# Altium PCB SmartWatchFinalProject.PcbDoc
Units mm, origin at the board's own origin, x right, y up, seen from the top; angles counter-clockwise.
Board outline 32.55 x 30.39 mm, 4 copper layers (Top Layer, Layer 1, Layer 2, Bottom Layer), stack 0.82 mm thick; 54 components, 48 nets, 236 pads, 106 vias.
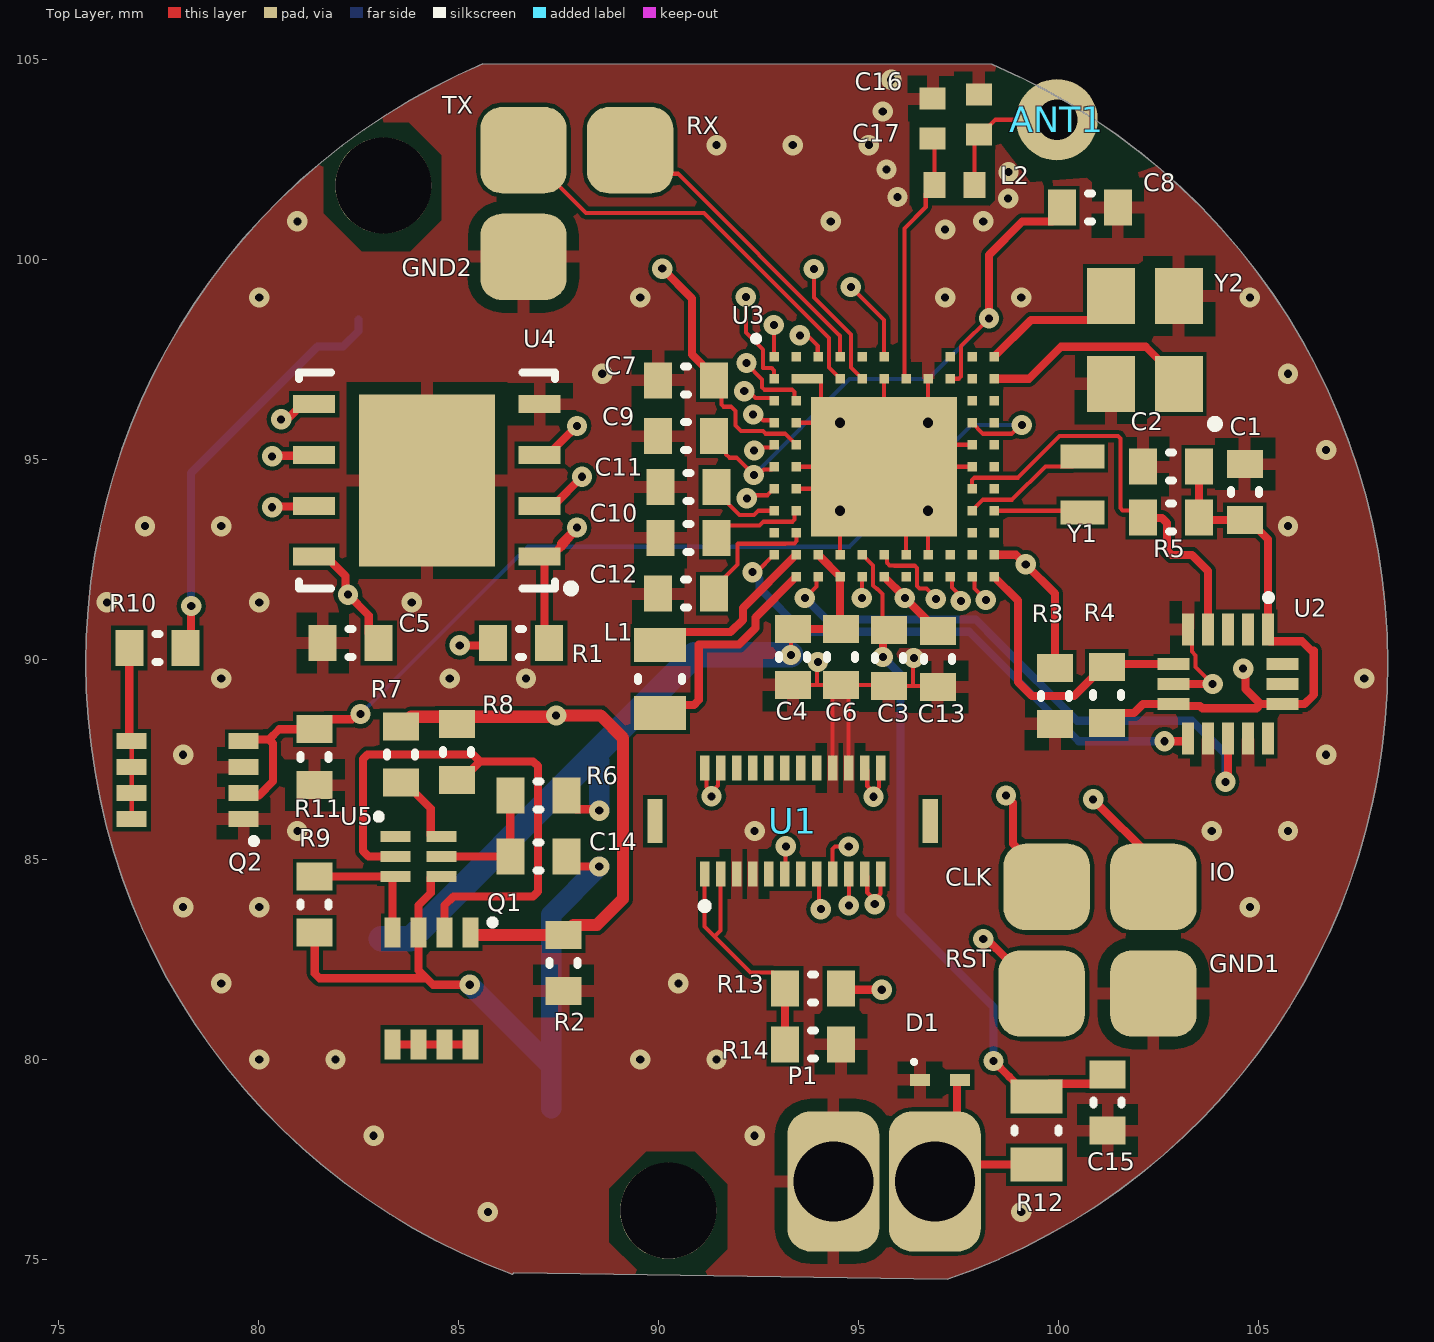
[diagram p0: Top Layer view]
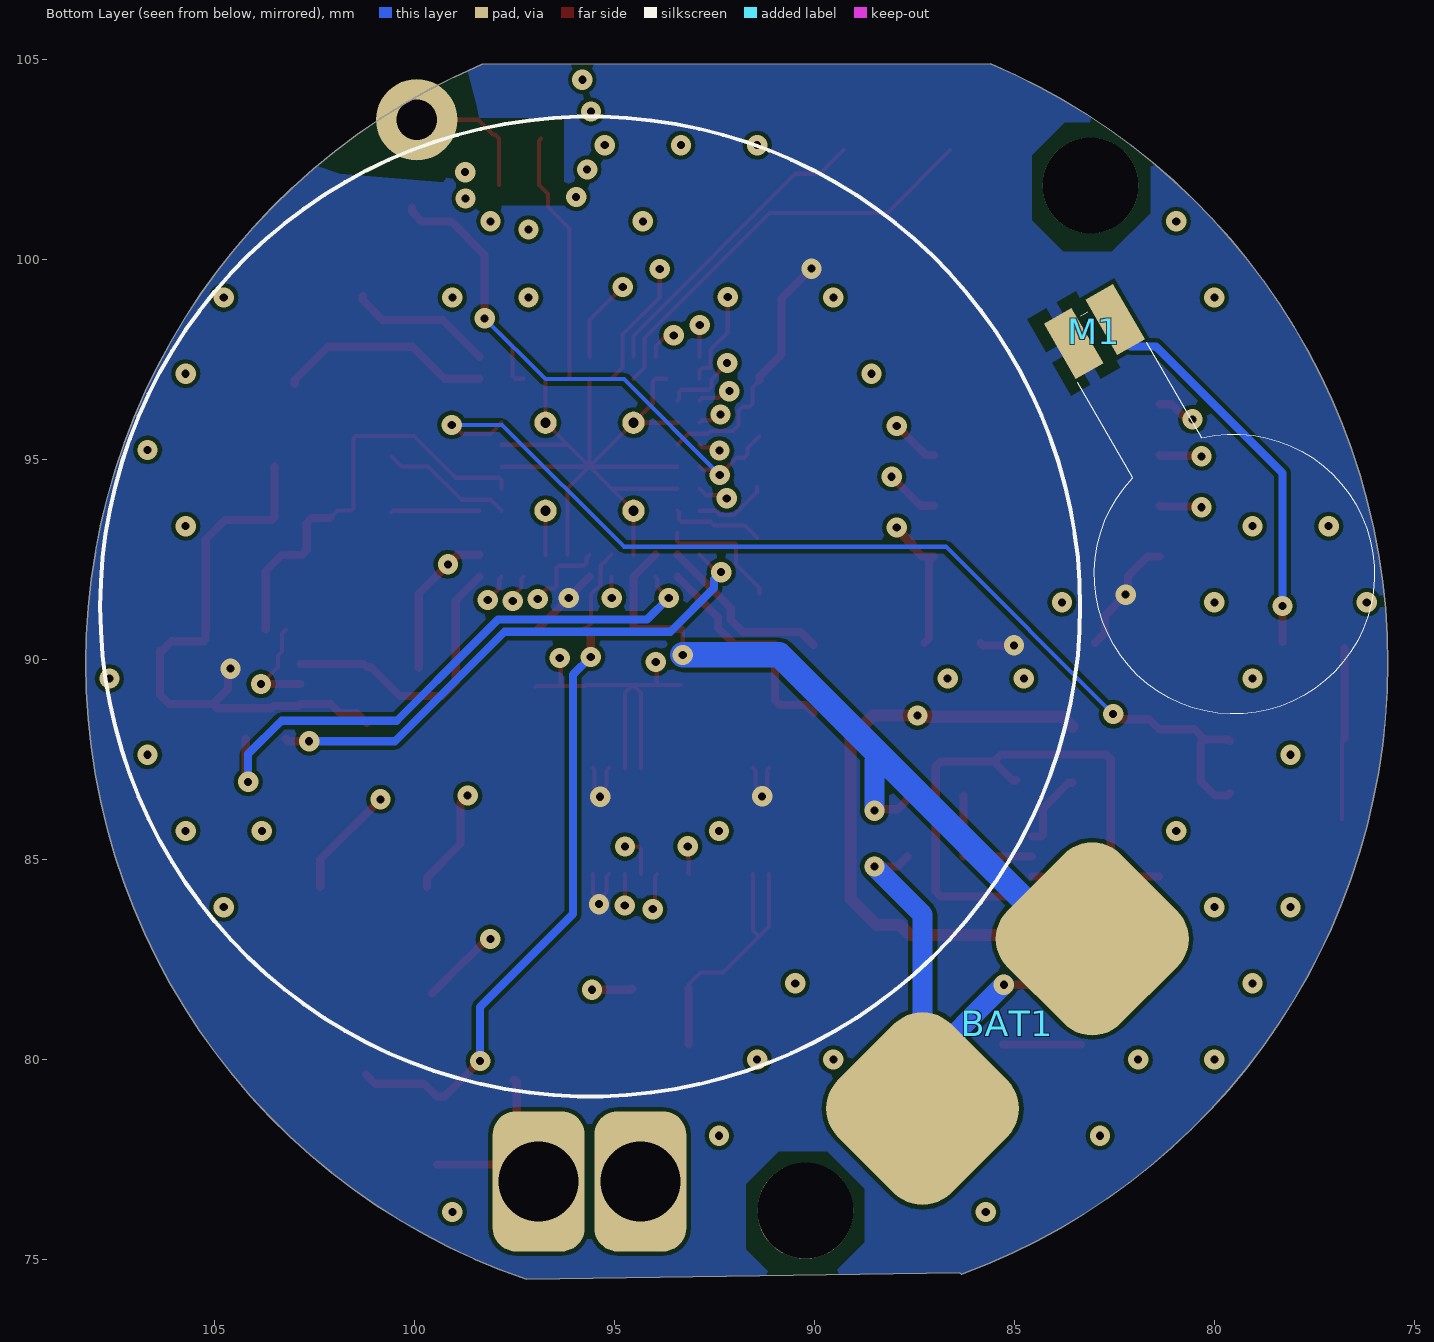
[diagram p1: Bottom Layer view, seen from below]
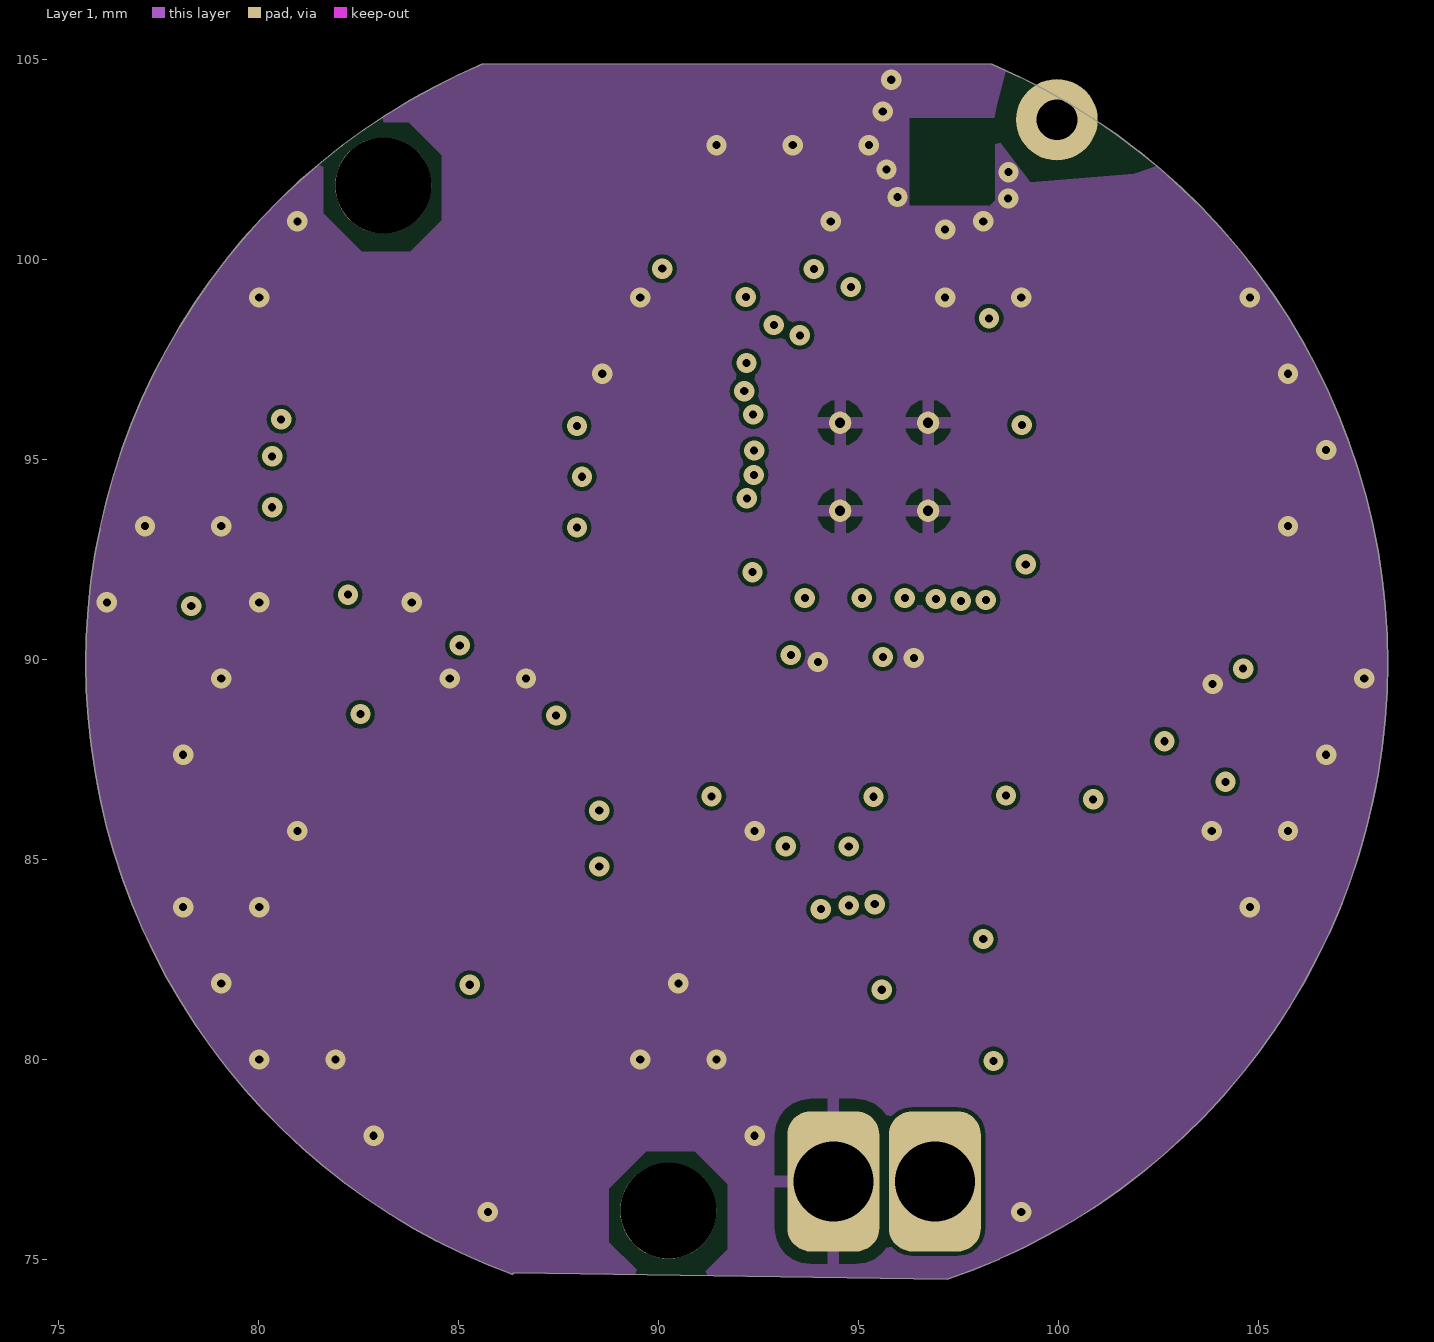
[diagram p2: Layer 1]
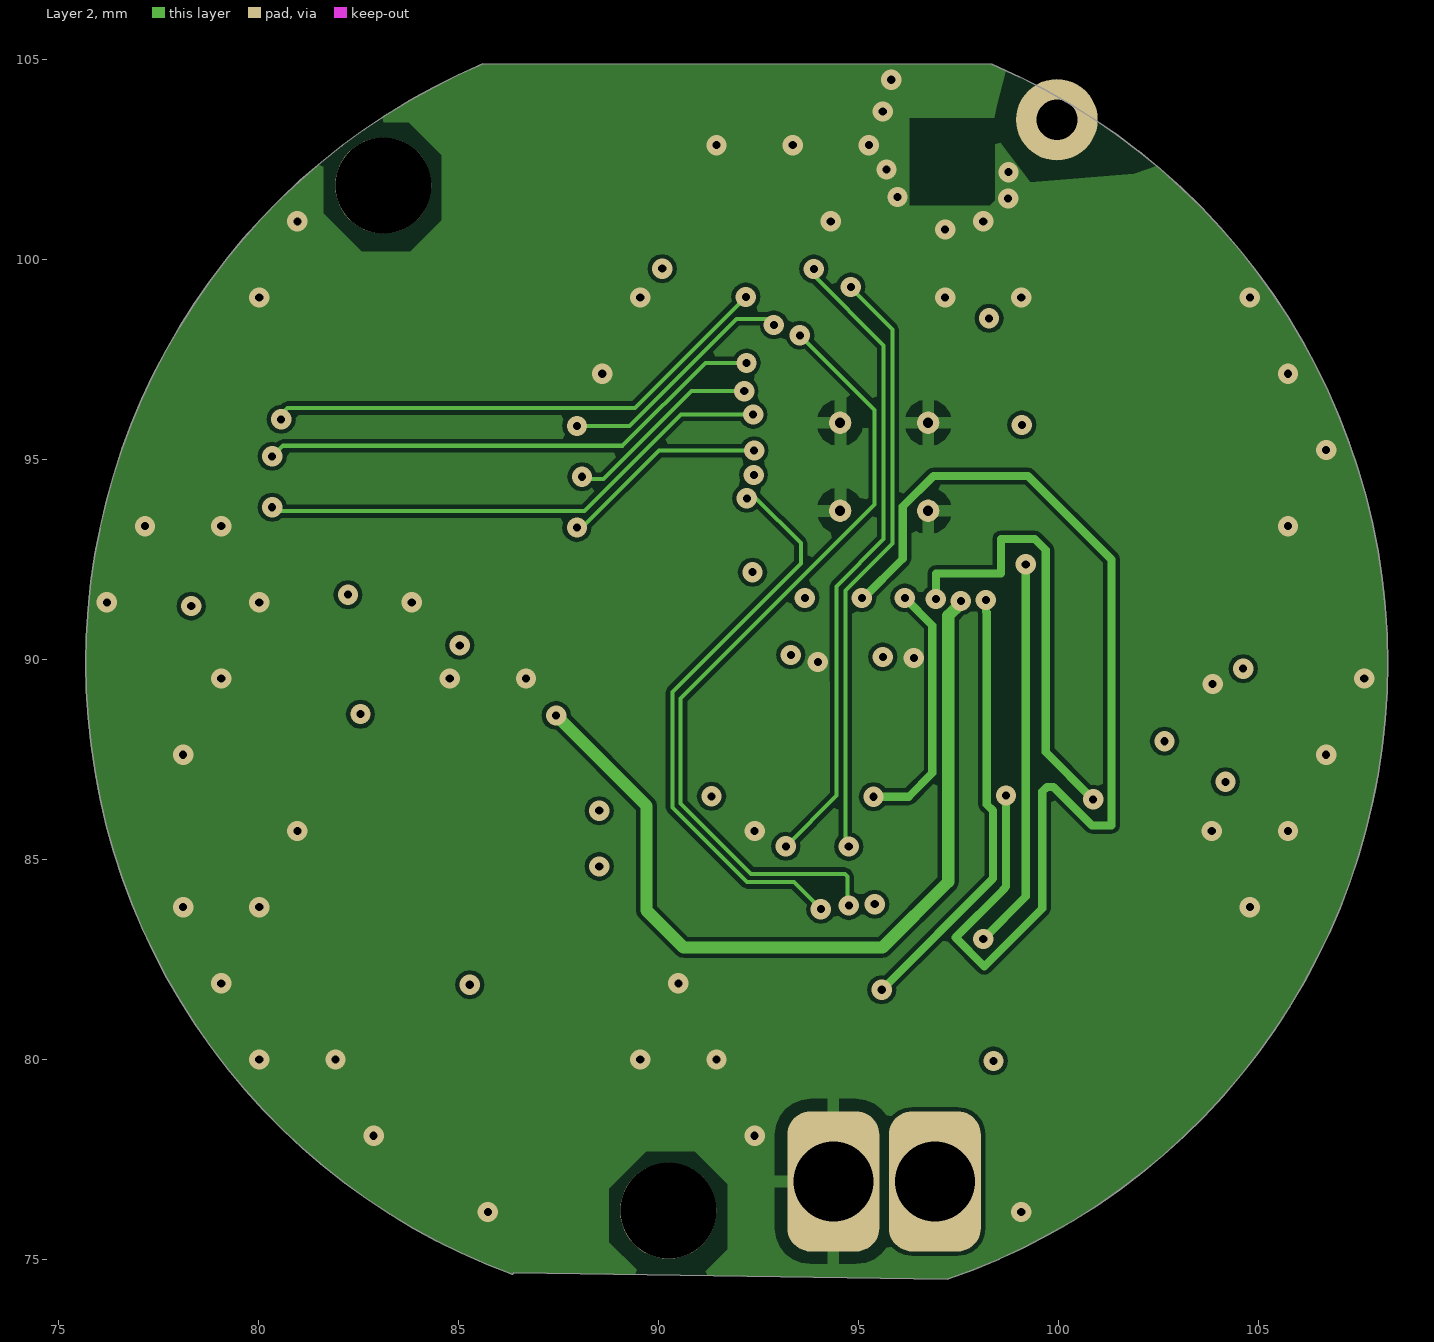
[diagram p3: Layer 2]

## Layer stack, top to bottom
Top Solder: solder mask 0.01, Solder Resist, Dk 3.5
Top Layer: signal copper 0.035
Dielectric 1: core 0.175, fr-4, Dk 4.29
Layer 1: signal copper 0.035
Dielectric 3: dielectric 0.33, Dk 3.96
Layer 2: signal copper 0.035
Dielectric 2: core 0.175, fr-4, Dk 4.29
Bottom Layer: signal copper 0.035
Bottom Solder: solder mask 0.01, Solder Resist, Dk 3.5

## Board outline
86.334,74.641 86.369,74.676 97.21,74.516 ccw(c91.948,89.916) 108.222,89.916 ccw(c91.948,89.916) 99.023,104.572 98.323,104.89 85.602,104.902 ccw(c91.948,89.916) 75.674,89.916 ccw(c91.948,89.916)

## Design rules (kind name [scope] priority, off if disabled: settings)
Clearance [All] p1: gap=0.102 ignorepadtopadclearanceinfootprint=FALSE
ComponentClearance [All] p1: gap=0 collisioncheckmode=3 verticalgap=0.254 showdistances=FALSE
HoleSize [All] p1 off: absolutevalues=TRUE maxlimit=2.54 minlimit=0.025 maxpercent=80.000 minpercent=20.000
HoleToHoleClearance [All] p1 off: gap=0.254 allowstackedmicrovias=TRUE
LayerPairs [All] p1 off: enforce=TRUE
MinimumSolderMaskSliver [All] p1 off: minsoldermaskwidth=0
NetAntennae [All] p1 off: netantennaetolerance=0
PolygonConnect [All] p1: thpad.connectstyle=Relief thpad.reliefconductorwidth=0.305 thpad.reliefentries=4 thpad.polygonreliefangle="90 Angle" thpad.airgapwidth=0.305 smdpad.connectstyle=Relief smdpad.reliefconductorwidth=0.305 smdpad.reliefentries=4 smdpad.polygonreliefangle="90 Angle" smdpad.airgapwidth=0.305 via.connectstyle=Direct via.reliefconductorwidth=0.305 via.reliefentries=4 via.polygonreliefangle="90 Angle" via.airgapwidth=0.305
RoutingVias [All] p1: holewidth=0.711 width=1.27 viastyle="Through Hole" minholewidth=0.203 minwidth=0.508 maxholewidth=127 maxwidth=127
SilkToSilkClearance [All] p1 off: silktosilkclearance=0
SilkToSolderMaskClearance [IsPad] p1 off: minsilkscreentomaskgap=0 clearancetoexposedcopper=TRUE
SolderMaskExpansion [All] p1: expansion=0.102
Width [All] p1: maxlimit=25.4 minlimit=0.102 preferedwidth=0.203 minimp=50.000000 maximp=50.000000 favimp=50.000000
22 further rules are at their usual default settings.

## Classes and differential pairs
component class "Components Class 1": C1 C2 C3 C4 C5 C6 C7 C9 C10 C11 C12 C13 C14 C16 CLK GND2 IO L2 Q1 R2 R3 R4 R5 R7 R8 R9 R11 RX TX U3 U4 U5 Y1
component class Sensors: C1 C2 R4 R5 U2
component class Power: BAT1 C14 C15 D1 P1 Q1 R6 R7 R8 R9 R12 U5
component class BLE: ANT1 ANT? C3 C4 C5 C6 C7 C8 C9 C10 C11 C12 C13 C17 CLK GND1 GND2 IO L1 L2 R1 R2 R3 RST RX TX U4 Y1 Y2
component class Actuators: M1 Q2 R10 R11 R13 R14 U1

## Components (designator, comment, footprint, x,y, rotation, side; value= is the part's Value field where it differs from the comment)
ANT1 "" "0.1\" Header" 99.949,103.505 r90 top
BAT1 "" RJD2430C1ST1 95.613,91.336 r315 bottom
C1 "" CAP_0603_HIGH 104.648,94.195 r90 top
C2 "" CAP_0603_HIGH 102.808,94.83 r180 top
C3 "4.7uF" CAP_0603_HIGH 95.75,90.05 r270 top
C4 "1uF" CAP_0603_HIGH 93.35,90.075 r270 top
C5 "" CAP_0603_HIGH 82.296,90.424 r180 top
C6 "1uF" CAP_0603_HIGH 94.55,90.075 r270 top
C7 "1uF" CAP_0603_HIGH 90.678,96.989 r180 top
C8 "4.7uF" CAP_0603_HIGH 100.773,101.307 r0 top
C9 "4.7uF" CAP_0603_HIGH 90.678,95.592 r180 top
C10 "10uF" CAP_0603_HIGH 90.743,93.052 r180 top
C11 "10uF" CAP_0603_HIGH 90.74,94.322 r180 top
C12 "10uF" CAP_0603_HIGH 90.678,91.655 r180 top
C13 "4.7uF" CAP_0603_HIGH 96.975,90.025 r270 top
C14 "" CAP_0603_HIGH 86.984,85.09 r0 top
C15 "10uF" CAP_0603_HIGH 101.219,78.932 r270 top
C16 "" CAP_0402_MEDIUM 96.845,103.53 r270 top (schematic designator C?)
C17 "" CAP_0402_MEDIUM 98,103.635 r270 top (schematic designator C?)
CLK "" "0.1\" Pad" 99.695,84.328 r0 top
D1 "" ESD9B5.0ST5G 97.028,79.502 r0 top
GND1 "" "0.1\" Pad" 102.362,81.661 r90 top
GND2 "" "0.1\" Pad" 86.614,100.076 r90 top
IO "" "0.1\" Pad" 102.362,84.328 r0 top
L1 "" IND_0805_HIGH 90.03,89.52 r270 top value=470nF
L2 "" IND_0402_MEDIUM 97.395,101.875 r180 top (schematic designator L?)
M1 "" C0720B001F 79.51,92.148 r150 bottom
P1 "" 800-10-002-30-507101 95.631,76.962 r180 top
Q1 "" ECH8693R-TL-W 84.317,81.788 r270 top
Q2 "" ECH8693R-TL-W 78.221,86.995 r180 top
R1 "10K" RES_0603_HIGH 86.552,90.424 r180 top
R2 "0.1Ohm" RES_0603_HIGH 87.619,82.423 r90 top
R3 "10K" RES_0603_HIGH 99.9,89.1 r90 top
R4 "10K" RES_0603_HIGH 101.2,89.125 r270 top
R5 "10K" RES_0603_HIGH 102.805,93.56 r0 top
R6 "330" RES_0603_HIGH 86.984,86.614 r180 top
R7 "2.2K" RES_0603_HIGH 83.555,87.63 r90 top
R8 "" RES_0603_HIGH 84.952,87.692 r90 top
R9 "5.1M" RES_0603_HIGH 81.396,83.882 r90 top
R10 "330" RES_0603_HIGH 77.459,90.297 r180 top
R11 "10K" RES_0603_HIGH 81.396,87.568 r90 top
R12 "0.39 Ohm" RES_0805_HIGH 99.441,78.232 r90 top
R13 "0 Ohm" RES_0603_HIGH 93.853,81.788 r180 top
R14 "0 Ohm" RES_0603_HIGH 93.853,80.391 r0 top
RST "" "0.1\" Pad" 99.568,81.661 r0 top
RX "" "0.1\" Pad" 89.281,102.743 r0 top
TX "" "0.1\" Pad" 86.614,102.743 r0 top
U1 "" AML130A2402A 91.97,89.795 r0 top
U2 "" LIS3DH 104.225,89.4 r270 top (schematic designator U?)
U3 "" DA14683 95.631,94.83 r0 top
U4 "" W25Q128JVPIQ 84.201,94.488 r180 top
U5 "" BQ29700DSER 83.996,85.082 r0 top
Y1 "" 9HT11-32.768KDZB-T 100.584,95.087 r270 top
Y2 "" 7M-16.000MEEQ-T 103,96.9 r90 top

## Footprints (in the part's own frame and the unit in brackets; to place one, negate y for a bottom-side part, rotate by r counter-clockwise, add the part's x,y. Pads: shape width x height; smd on the part's side, far side on the other; paste and mask are expansions set on the pad)
"0.1\" Header" [mm]
  round 2.04 hole 1.02: 1(0,0)
"0.1\" Pad" [mil]
  rrect50% 85x85 smd paste-85: 1(0,0)
7M-16.000MEEQ-T [mm]
  rect 1.4x1.2 smd: 1(0,0) 2(2.2,0) 3(2.2,1.7) 4(0,1.7)
  silkscreen extent -1.1,-1 -0.9,-0.8, body extent -0.7,-0.4 2.9,2.1, height 0.7
9HT11-32.768KDZB-T [mm]
  rect 0.6x1.1 smd: 1(0,0) 2(1.4,0)
  body extent -0.3,-0.6 1.7,0.6, height 0.6
800-10-002-30-507101 [mm]
  rrect50% 2.3x3.5 hole 2: 1(-1.27,0) 2(1.27,0)
  body extent -2.54,-1.27 2.54,1.27, height 4
AML130A2402A [mm]
  rect 0.38x1.1 smd: 0(-2.065,-3.825) 0(4.815,-3.825)
  rect 0.23x0.63 smd: 1(-0.825,-5.15) 2(-0.425,-5.15) 3(-0.025,-5.15) 4(0.375,-5.15) 5(0.775,-5.15) 6(1.175,-5.15) 7(1.575,-5.15) 8(1.975,-5.15) 9(2.375,-5.15) 10(2.775,-5.15) 11(3.175,-5.15) 12(3.575,-5.15) 13(3.575,-2.5) 14(3.175,-2.5) 15(2.775,-2.5) 16(2.375,-2.5) 17(1.975,-2.5) 18(1.575,-2.5) 19(1.175,-2.5) 20(0.775,-2.5) 21(0.375,-2.5) 22(-0.025,-2.5) 23(-0.425,-2.5) 24(-0.825,-2.5)
  silkscreen extent -0.9,-6.02 -0.75,-5.88, body extent -17.75,-21.18 17.75,17.75, height 3.07
BQ29700DSER [mm]
  rect 0.75x0.28 smd: 1(-0.575,0.5) 2(-0.575,0) 3(-0.575,-0.5) 4(0.575,-0.5) 5(0.575,0) 6(0.575,0.5)
  silkscreen extent -1.05,0.95 -0.95,1.05, body extent -0.78,-0.77 0.78,0.77, height 0.8
C0720B001F [mm]
  rect 0.8x1.6 smd: 1(-0.6,7) 2(0.6,7)
  silkscreen extent -3.5,-3.5 3.5,7.5, body extent -3.5,-3.5 3.5,7.5, height 2.1
CAP_0402_MEDIUM [mm]
  rect 0.55x0.65 smd: 1(-0.5,0) 2(0.5,0)
  body extent -0.52,-0.27 0.53,0.28, height 0.4
CAP_0603_HIGH [mm]
  rect 0.7x0.9 smd: 1(-0.7,0) 2(0.7,0)
  silkscreen extent -0.05,-0.35 0.05,0.35, body extent -0.85,-0.47 0.85,0.47, height 0.6
DA14683 [mm]
  rect 0.24x0.24 smd paste-0.025: A1(-2.75,2.75) A2(-2.75,2.2) A3(-2.75,1.65) A4(-2.75,1.1) A5(-2.75,0.55) A6(-2.75,0) A7(-2.75,-0.55) A8(-2.75,-1.1) A9(-2.75,-1.65) A10(-2.75,-2.2) A11(-2.2,-2.75) A12(-1.65,-2.75) A13(-1.1,-2.75) A14(-0.55,-2.75) A15(0,-2.75) A16(0.55,-2.75) A17(1.1,-2.75) A18(1.65,-2.75) A19(2.2,-2.75) A20(2.75,-2.75) A21(2.75,-2.2) A22(2.75,-1.65) A23(2.75,-1.1) A24(2.75,-0.55) A25(2.75,0) A26(2.75,0.55) A27(2.75,1.1) A28(2.75,1.65) A29(2.75,2.2) A30(2.75,2.75) A31(2.2,2.75) A32(1.65,2.75) A33(0,2.75) A34(-0.55,2.75) A35(-1.1,2.75) A36(-1.65,2.75) A37(-2.2,2.75) B1(-2.2,1.65) B2(-2.2,0.55) B3(-2.2,-1.1) B4(-2.2,-1.65) B5(-2.2,-2.2) B6(-1.65,-2.2) B7(-0.55,-2.2) B8(0,-2.2) B9(1.1,-2.2) B10(1.65,-2.2) B11(2.2,-2.2) B12(2.2,-1.65) B13(2.2,-1.1) B14(2.2,-0.55) B15(2.2,1.1) B16(2.2,1.65) B17(2.2,2.2) B18(1.65,2.2) B19(1.1,2.2) B20(0.55,2.2) B21(0,2.2) B22(-0.55,2.2) B23(-1.1,2.2) GND(-2.2,-0.55) GND(-2.2,0) GND(-2.2,1.1) GND(-1.1,-2.2) GND(0.55,-2.2) GND(2.2,0) GND(2.2,0.55)
  rect 0.79x0.24 smd paste-0.025: GND(-1.925,2.2)
  round 0.559 hole 0.254: GND(-1.1,-1.1) GND(-1.1,1.1) GND(1.1,-1.1) GND(1.1,1.1)
  rect 3.65x3.485 smd paste-1 mask+0: GND(0,0)
  silkscreen extent -3.27,3.13 -3.13,3.27, body extent -3,-3 3,3, height 0.85
ECH8693R-TL-W [mm]
  rect 0.75x0.4 smd: 1(-1.4,0.975) 2(-1.4,0.325) 3(-1.4,-0.325) 4(-1.4,-0.975) 5(1.4,-0.975) 6(1.4,-0.325) 7(1.4,0.325) 8(1.4,0.975)
  silkscreen extent -1.7,1.47 -1.6,1.57, body extent -1.18,-1.48 1.18,1.48, height 0.95
ESD9B5.0ST5G [mm]
  rect 0.5x0.3 smd: 1(-0.5,0) 2(0.5,0)
  silkscreen extent -0.7,0.4 -0.6,0.5, body extent -0.5,-0.33 0.5,0.33, height 0.4
IND_0402_MEDIUM [mm]
  rect 0.55x0.65 smd: 1(-0.5,0) 2(0.5,0)
  body extent -0.52,-0.27 0.53,0.28, height 0.4
IND_0805_HIGH [mm]
  rect 0.85x1.3 smd: 1(-0.85,0) 2(0.85,0)
  silkscreen extent -0.05,-0.55 0.05,0.55, body extent -1.1,-0.67 1.1,0.68, height 0.7
LIS3DH [mm]
  rect 0.8x0.3 smd: 1(-1.365,1) 2(-1.365,0.5) 3(-1.365,0) 4(-1.365,-0.5) 5(-1.365,-1) 9(1.365,-1) 10(1.365,-0.5) 11(1.365,0) 12(1.365,0.5) 13(1.365,1)
  rect 0.3x0.8 smd: 6(-0.5,-1.365) 7(0,-1.365) 8(0.5,-1.365) 14(0.5,1.365) 15(0,1.365) 16(-0.5,1.365)
  silkscreen extent -2.23,0.94 -2.08,1.09, body extent -1.5,-1.5 1.5,1.5, height 1
RES_0603_HIGH [mm]
  rect 0.7x0.9 smd: 1(-0.7,0) 2(0.7,0)
  silkscreen extent -0.05,-0.35 0.05,0.35, body extent -0.85,-0.47 0.85,0.47, height 0.6
RES_0805_HIGH [mm]
  rect 0.85x1.3 smd: 1(-0.85,0) 2(0.85,0)
  silkscreen extent -0.05,-0.55 0.05,0.55, body extent -1.1,-0.67 1.1,0.68, height 0.7
RJD2430C1ST1 [mm]
  rrect50% 4x4 smd: 1(-3,14.75) 2(3,14.75)
  silkscreen extent -12.25,-12.25 12.25,12.25, body extent -12.25,-12.25 12.25,16.25, height 3.35
W25Q128JVPIQ [mm]
  rect 1.05x0.45 smd: 1(-2.82,1.905) 2(-2.82,0.635) 3(-2.82,-0.635) 4(-2.82,-1.905) 5(2.82,-1.905) 6(2.82,-0.635) 7(2.82,0.635) 8(2.82,1.905)
  rect 3.4x4.3 smd paste-1.7: 4(0,0)
  silkscreen extent -3.7,-2.7 3.2,2.8, body extent -3.05,-2.55 3.05,2.55, height 0.8

## Part data
ANT1: library part "0.1\" Header", "0.1\" Header"
BAT1: library part RJD2430C1ST1, "Coin, 24.5mm 3.7V Lithium-Ion Battery Rechargeable (Secondary) 110mAh", Manufacturer 1="CDE Illinois Capacitor", Supplier Part Number 1=1572-1630-ND, Manufacturer Part Number 1=RJD2430C1ST1, Pricing 1="1=11.09000, 30=8.60200, 60=8.11500, 120=7.68217, 270=7.24941, 510=7.03300 (USD)", RoHS=No, Stock 1=39, Supplier 1=Digi-Key
C1: library part Capacitor_0603, "0603 Capacitor", Capacitance=100uF, Case/Package=0603, Case Code (Metric)=1608, ESR (Equivalent Series Resistance)=10R, Manufacturer 1="Kyocera AVX", Manufacturer Part Number 1=F980J107MMAAXE, Max Operating Temperature=125°C, Min Operating Temperature=-55°C, Supplier Part Number 1=478-9836-1-ND, Tolerance=20%, Voltage Rating=6.3V, Case Code (Imperial)=0603, ComponentLink1Description=http://www.farnell.com/datasheets/2602422.pdf?src-supplier=Farnell, ComponentLink1URL=http://www.farnell.com/datasheets/2602422.pdf?src-supplier=Farnell, ComponentLink2Description=http://datasheets.avx.com/F98.pdf?src-supplier=Digi-Key, ComponentLink2URL=http://datasheets.avx.com/F98.pdf?src-supplier=Digi-Key, Height - Seated (Max)=0.035inch, Length=0.063inch, Mount="Surface Mount", Packaging="Tape and Reel", Pricing 1="1=0.67000, 10=0.49100, 100=0.33670, 500=0.26658, 1000=0.22448 (USD)", RoHS=Yes, Stock 1=15476, Supplier 1=Digi-Key, Width=0.033inch
C2: library part Capacitor_0603, "0603 Capacitor", Capacitance=10uF, Case/Package=0603, Case Code (Metric)=1608, Dielectric=X5R, Manufacturer 1=Murata, Manufacturer Part Number 1=GRM188R60J106ME47D, Max Operating Temperature=85°C, Min Operating Temperature=-55°C, Package Quantity=4000, Supplier Part Number 1=490-3896-1-ND, Tolerance=20%, Voltage=6.3V, Case Code (Imperial)=0603, ComponentLink1Description=https://datasheet.ciiva.com/22776/1747457-22776418.pdf?src-supplier=Farnell, ComponentLink1URL=https://datasheet.ciiva.com/22776/1747457-22776418.pdf?src-supplier=Farnell, ComponentLink2Description=https://datasheet.ciiva.com/3777/10175grm188r60j106me4723-3777268.pdf?src-supplier=Arrow, ComponentLink2URL=https://datasheet.ciiva.com/3777/10175grm188r60j106me4723-3777268.pdf?src-supplier=Arrow, ComponentLink3Description=https://datasheet.ciiva.com/28584/415295-28584232.pdf?src-supplier=Element14, ComponentLink3URL=https://datasheet.ciiva.com/28584/415295-28584232.pdf?src-supplier=Element14, ComponentLink4Description=https://datasheet.ciiva.com/29202/450781-da-01-de-vs-chip-kond-0603-10-0-uf-20pr-6-3v-x5r-29202806.pdf?src-supplier=Conrad, ComponentLink4URL=https://datasheet.ciiva.com/29202/450781-da-01-de-vs-chip-kond-0603-10-0-uf-20pr-6-3v-x5r-29202806.pdf?src-supplier=Conrad, ComponentLink5Description=https://datasheet.ciiva.com/29199/454401-da-01-en-vs-kondensator-0603-29199677.pdf?src-supplier=Conrad, ComponentLink5URL=https://datasheet.ciiva.com/29199/454401-da-01-en-vs-kondensator-0603-29199677.pdf?src-supplier=Conrad, ComponentLink6Description=https://datasheet.ciiva.com/16373/l0005e-16373580.pdf?src-supplier=Future+Electronics, ComponentLink6URL=https://datasheet.ciiva.com/16373/l0005e-16373580.pdf?src-supplier=Future+Electronics, ComponentLink7Description=https://datasheet.ciiva.com/138/partnumbering-e-01-138658.pdf?src-supplier=Digi-Key, ComponentLink7URL=https://datasheet.ciiva.com/138/partnumbering-e-01-138658.pdf?src-supplier=Digi-Key, ComponentLink8Description=https://datasheet.ciiva.com/138/partnumbering-e-01-138659.pdf?src-supplier=Digi-Key, ComponentLink8URL=https://datasheet.ciiva.com/138/partnumbering-e-01-138659.pdf?src-supplier=Digi-Key, ComponentLink9Description=https://datasheet.ciiva.com/138/partnumbering-e-01-138660.pdf?src-supplier=Digi-Key, ComponentLink9URL=https://datasheet.ciiva.com/138/partnumbering-e-01-138660.pdf?src-supplier=Digi-Key, ComponentLink10Description=https://datasheet.ciiva.com/14116/grmseries-highdielectrictype-eng-14116428.pdf?src-supplier=Distrelec, ComponentLink10URL=https://datasheet.ciiva.com/14116/grmseries-highdielectrictype-eng-14116428.pdf?src-supplier=Distrelec, Depth=0.8mm, Height=0.8mm, Lead Free="Lead Free", Length=1.6mm, Material=Ceramic, Mount="Surface Mount", Packaging="Tape and Reel", Pricing 1="1=0.37000, 10=0.25900, 100=0.15530, 500=0.11644, 1000=0.09833 (USD)", Radiation Hardening=No, REACH SVHC="No SVHC", RoHS=Yes, Stock 1=20724673, Supplier 1=Digi-Key, Termination=SMD/SMT, Thickness=0.035inch, Voltage Rating=6.3V, Voltage Rating (DC)=6.3V, Width=0.031inch
C3 C8 C9 C13: library part Capacitor_0603_2, "0603 Capacitor"
C4 C6 C7: library part Capacitor_0603_3, "0603 Capacitor"
C5: library part Capacitor_0603, "0603 Capacitor"
C10 C11 C12 C15: library part Capacitor_0603_1, "0603 Capacitor"
C14: library part Capacitor_0603, "0603 Capacitor", Capacitance=100nF, Case/Package=0603, Case Code (Metric)=1608, Dielectric=X7R, Manufacturer 1=TDK, Manufacturer Part Number 1=CGA3E2X7R1H104K080AA, Max Operating Temperature=125°C, Min Operating Temperature=-55°C, Package Quantity=1, Ratings=AEC-Q200, Supplier Part Number 1=445-5666-6-ND, Tolerance=10%, Voltage=50V, Case Code (Imperial)=0603, ComponentLink1Description=https://datasheet.ciiva.com/24216/cga3e2x7r1h104k080aa-266291-24216208.pdf?src-supplier=Mouser, ComponentLink1URL=https://datasheet.ciiva.com/24216/cga3e2x7r1h104k080aa-266291-24216208.pdf?src-supplier=Mouser, ComponentLink2Description=https://datasheet.ciiva.com/15192/getdatasheetpartid-715867-15192412.pdf?src-supplier=Verical, ComponentLink2URL=https://datasheet.ciiva.com/15192/getdatasheetpartid-715867-15192412.pdf?src-supplier=Verical, ComponentLink3Description=https://datasheet.ciiva.com/16500/mlccspec-automotive-general-midvoltage-en-16500693.pdf?src-supplier=Future+Electronics, ComponentLink3URL=https://datasheet.ciiva.com/16500/mlccspec-automotive-general-midvoltage-en-16500693.pdf?src-supplier=Future+Electronics, ComponentLink4Description=https://datasheet.ciiva.com/22725/1735392-22725642.pdf?src-supplier=Element14, ComponentLink4URL=https://datasheet.ciiva.com/22725/1735392-22725642.pdf?src-supplier=Element14, ComponentLink5Description=https://datasheet.ciiva.com/23803/1936565-23803084.pdf?src-supplier=Newark, ComponentLink5URL=https://datasheet.ciiva.com/23803/1936565-23803084.pdf?src-supplier=Newark, ComponentLink6Description=https://datasheet.ciiva.com/46385/1735392-46385708.pdf?src-supplier=Element14, ComponentLink6URL=https://datasheet.ciiva.com/46385/1735392-46385708.pdf?src-supplier=Element14, Composition=Ceramic, Depth=0.8mm, Height=0.8mm, Lead Free="Lead Free", Length=1.6mm, Mount="Surface Mount", Packaging="Tape and Reel", Pricing 1="1=0.10000, 10=0.07500, 100=0.03350, 500=0.02390, 1000=0.01878 (USD)", Radiation Hardening=No, REACH SVHC="No SVHC", RoHS=Yes, Stock 1=11655935, Supplier 1=Digi-Key, Termination=SMD/SMT, Thickness=0.035inch, Voltage Rating=50V, Voltage Rating (DC)=50V, Weight=7.1E-05oz, Width=0.8mm
C16 C17: library part Capacitor_0402, "0402 Capacitor"
CLK GND1 GND2 IO RST RX TX: library part "0.1\" Pad", "0.1\" Pad"
D1: library part ESD9B5.0ST5G, "TVS DIODE 5V SOD923", Breakdown Voltage=5.8V, Capacitance=15pF, Case/Package=SOD-923-2, Clamping Voltage=12.5V, Leakage Current=1uA, Manufacturer 1="ON Semiconductor", Max Breakdown Voltage=7.8V, Max Operating Temperature=150°C, Max Power Dissipation=300mW, Max Surge Current=1A, Min Operating Temperature=-55°C, Operating Supply Voltage=5V, Package Quantity=1, Power Line Protection=No, Supplier Part Number 1=ESD9B5.0ST5GOSCT-ND, Test Current=1mA, ComponentLink1Description=https://datasheet.ciiva.com/1219/1596367-1219274.pdf?src-supplier=Newark, ComponentLink1URL=https://datasheet.ciiva.com/1219/1596367-1219274.pdf?src-supplier=Newark, ComponentLink2Description=https://datasheet.ciiva.com/15143/getdatasheetpartid-148214-15143780.pdf?src-supplier=Verical, ComponentLink2URL=https://datasheet.ciiva.com/15143/getdatasheetpartid-148214-15143780.pdf?src-supplier=Verical, ComponentLink3Description=https://datasheet.ciiva.com/3304/esd9b-d-3304010.pdf?src-supplier=Avnet, ComponentLink3URL=https://datasheet.ciiva.com/3304/esd9b-d-3304010.pdf?src-supplier=Avnet, ComponentLink4Description=https://datasheet.ciiva.com/339/esd9b-d-339708.pdf?src-supplier=Digi-Key, ComponentLink4URL=https://datasheet.ciiva.com/339/esd9b-d-339708.pdf?src-supplier=Digi-Key, ComponentLink5Description=https://datasheet.ciiva.com/339/esd9b-d-339707.pdf?src-supplier=Digi-Key, ComponentLink5URL=https://datasheet.ciiva.com/339/esd9b-d-339707.pdf?src-supplier=Digi-Key, ComponentLink6Description=https://datasheet.ciiva.com/4508/esd9b-d-4508620.pdf?src-supplier=Mouser, ComponentLink6URL=https://datasheet.ciiva.com/4508/esd9b-d-4508620.pdf?src-supplier=Mouser, Composition=Zener, Contact Plating=Tin, Depth=0.6mm, Direction=Bidirectional, Element Configuration=Single, ESD Protection=Yes, Halogen Free="Halogen Free", Height=0.4mm, Lead Free="Lead Free", Length=0.8mm, Manufacturer Part Number 1=ESD9B5.0ST5G, Max Reverse Leakage Current=1uA, Min Breakdown Voltage=5.8V, Number of Bidirectional Channels=1, Number of Channels=1, Number of Elements=1, Number of Lines=1, Number of Pins=2, Packaging="Tape and Reel", Peak Pulse Current=1A, Peak Pulse Power=300mW, Polarity=Bidirectional, Pricing 1="1=0.14000, 10=0.13100, 100=0.07120, 500=0.04380, 1000=0.02986 (USD)", Radiation Hardening=No, REACH SVHC="No SVHC", Reverse Breakdown Voltage=5.8V, Reverse Standoff Voltage=5V, RoHS=Yes, Stock 1=624705, Supplier 1=Digi-Key, Termination=SMD/SMT, Width=0.65mm, Working Voltage=5V
L1: library part Inductor_0805, "Inductor_0805", Parameter 1=CKP2012, Parameter 2=NR47M-T
L2: library part Inductor_0402, "Inductor_0402"
M1: library part C0720B001F, "DC Motor Vibration, ERM 10000 RPM 3VDC", Manufacturer 1="Jinlong Machinery & Electronics", Manufacturer Part Number 1=Z4FC1B1301781, Max Operating Temperature=70°C, Min Operating Temperature=-20°C, Supplier Part Number 1=1670-1011-1-ND, ComponentLink1Description=http://www.vibration-motor.com/products/download/Z4FC1B1301781.pdf?src-supplier=Digi-Key, ComponentLink1URL=http://www.vibration-motor.com/products/download/Z4FC1B1301781.pdf?src-supplier=Digi-Key, Pricing 1="1=3.49000, 5=3.30200, 10=3.21000, 25=3.11840, 50=2.84300, 100=2.56800, 250=2.47624, 500=2.43956 (USD)", RoHS=Yes, RPM=10000RPM, Stock 1=12491, Supplier 1=Digi-Key, Termination=SMD/SMT
P1: library part 800-10-002-30-507101, "2 Position Spring Mating Target Connector Surface Mount", Current Rating=3.5A, Housing Color=Black, Manufacturer 1=Preci-Dip, Max Operating Temperature=125°C, Max Voltage Rating (AC)=100V, Min Operating Temperature=-55°C, Package Quantity=1710, Supplier Part Number 1=1212-1446-ND, Voltage Rating=150V, ComponentLink1Description=https://datasheet.ciiva.com/11750/0900766b80e0c4e6-11750532.pdf?src-supplier=RSComponents, ComponentLink1URL=https://datasheet.ciiva.com/11750/0900766b80e0c4e6-11750532.pdf?src-supplier=RSComponents, ComponentLink2Description=https://datasheet.ciiva.com/18468/catalog-18468028.pdf?src-supplier=Digi-Key, ComponentLink2URL=https://datasheet.ciiva.com/18468/catalog-18468028.pdf?src-supplier=Digi-Key, Contact Material=Brass, Contact Plating=Gold, Depth=2.54mm, Gender=Male, Height=4mm, Housing Material=Polychlorinated, Length=5.08mm, Manufacturer Part Number 1=800-10-002-30-507101, Material=Brass, Max Current Rating=3.5A, Mount="Surface Mount", Number of Contacts=2, Number of Rows=1, Orientation=Straight, Packaging=Bulk, Pitch=2.54mm, Pricing 1="1=0.47000, 10=0.44500, 25=0.40000, 50=0.35560, 100=0.34080, 250=0.31116, 500=0.29634, 1000=0.24448, 2500=0.22226 (USD)", RoHS=Yes, Stock 1=803, Supplier 1=Digi-Key, Termination=Solder
Q1 Q2: library part ECH8693R-TL-W, "Mosfet Array 2 N-Channel (Dual) Common Drain 24V 14A 1.4W Surface Mount SOT-28FL/ECH8", Case/Package=SMD/SMT, Continuous Drain Current (ID)=14A, Drain to Source Breakdown Voltage=24V, Drain to Source Resistance=7mR, Gate to Source Voltage (Vgs)=12.5V, Manufacturer 1="ON Semiconductor", Max Operating Temperature=150°C, Max Power Dissipation=1.4W, Min Operating Temperature=-55°C, Package Quantity=3000, Supplier Part Number 1=ECH8693R-TL-WOSCT-ND, ComponentLink1Description=https://datasheet.ciiva.com/30022/ech8693r-d-30022230.pdf?src-supplier=Avnet, ComponentLink1URL=https://datasheet.ciiva.com/30022/ech8693r-d-30022230.pdf?src-supplier=Avnet, Contact Plating=Tin, Drain to Source Voltage (Vdss)=24V, Fall Time=22200ns, FET Type="2 N-Channel", Lead Free="Lead Free", Manufacturer Part Number 1=ECH8693R-TL-W, Mount="Surface Mount", Number of Channels=2, Number of Pins=8, Packaging="Tape and Reel", Pricing 1="1=0.58000, 10=0.49500, 100=0.36940, 500=0.29028, 1000=0.22430 (USD)", Radiation Hardening=No, Rds On Max=7mR, Rise Time=525ns, RoHS=Yes, Stock 1=2348, Supplier 1=Digi-Key, Turn-Off Delay Time=18650ns, Turn-On Delay Time=545ns
R1 R3 R4 R5 R11: library part Resistor_0603_3, "0603 Resistor"
R2: library part Resistor_0603_4, "0603 Resistor"
R6 R10: library part Resistor_0603_2, "0603 Resistor"
R7: library part Resistor_0603_1, "0603 Resistor"
R8: library part Resistor_0603, "0603 Resistor", Case/Package=0603, Case Code (Metric)=1608, Manufacturer 1=Panasonic, Manufacturer Part Number 1=ERJ3GEYJ515V, Max Operating Temperature=155°C, Max Power Dissipation=100mW, Min Operating Temperature=-55°C, Package Quantity=1, Resistance=5.1MR, Supplier Part Number 1=P5.1MGCT-ND, Temperature Coefficient=150ppm/°C, Tolerance=5%, Voltage Rating=75V, Voltage Rating (DC)=50V, Case Code (Imperial)=0603, ComponentLink1Description=https://datasheet.ciiva.com/24072/aoa0000ce1-37422-24072359.pdf?src-supplier=Mouser, ComponentLink1URL=https://datasheet.ciiva.com/24072/aoa0000ce1-37422-24072359.pdf?src-supplier=Mouser, ComponentLink2Description=https://datasheet.ciiva.com/9195/aoa0000ce1-9195547.pdf?src-supplier=Avnet, ComponentLink2URL=https://datasheet.ciiva.com/9195/aoa0000ce1-9195547.pdf?src-supplier=Avnet, ComponentLink3Description=https://datasheet.ciiva.com/43460/1500035-43460797.pdf?src-supplier=Farnell, ComponentLink3URL=https://datasheet.ciiva.com/43460/1500035-43460797.pdf?src-supplier=Farnell, ComponentLink4Description=https://datasheet.ciiva.com/46448/1500035-46448447.pdf?src-supplier=Element14, ComponentLink4URL=https://datasheet.ciiva.com/46448/1500035-46448447.pdf?src-supplier=Element14, Composition="Thick Film", Contact Plating=Tin, Depth=0.8mm, Features="Automotive AEC-Q200", Height=0.45mm, Lead Free="Lead Free", Length=1.6mm, Military Standard=Not, Mount="Surface Mount", Number of Terminations=2, Packaging="Tape and Reel", Power Rating=100mW, Pricing 1="1=0.10000, 10=0.04300, 100=0.01760, 1000=0.00791, 2500=0.00686 (USD)", REACH SVHC="No SVHC", RoHS=Yes, Stock 1=168591, Supplier 1=Digi-Key, Termination=SMD/SMT, Width=0.031inch
R9: library part Resistor_0603, "0603 Resistor"
R12: library part Resistor_0805, "0805 Resistor"
R13 R14: library part Resistor_0603_5, "0603 Resistor"
U1: library part AML130A2402A, "AML130A2402A Round 1.3\" TFT Display"
U2: library part LIS3DH, "LIS3DH ACCEL 2-16G I2C/SPI 16LGA"
U3: library part DA14683, "SmartBond DA14683 Single-chip high-security Bluetooth 5 solution with expandable memory", Manufacturer 1="Dialog Semiconductor", Manufacturer Part Number 1=DA14683-00000A92, Supplier Part Number 1=DA14683-00000A92CT-ND, Pricing 1="1=5.12000, 10=4.57400, 25=4.11680, 100=3.75090, 250=3.38496, 500=3.03730, 1000=2.56158 (USD)", RoHS=No, Stock 1=3880, Supplier 1=Digi-Key
U4: library part W25Q128JVPIQ, "FLASH - NOR Memory IC 128Mb (16M x 8) SPI - Quad I/O, QPI, DTR 133MHz  8-WSON (6x5)"
U5: library part BQ29700DSER, "Battery Battery Protection IC Lithium-Ion/Polymer 6-WSON (1.5x1.5)", Manufacturer 1="Texas Instruments", Max Operating Temperature=85°C, Min Operating Temperature=-40°C, Operating Supply Voltage=8V, Package Quantity=3000, Supplier Part Number 1=296-43985-1-ND, ComponentLink1Description=http://www.ti.com/general/docs/lit/getliterature.tsp?genericPartNumber=BQ2970&amp;&amp;fileType=pdf&src-supplier=Avnet+Asia, ComponentLink1URL=http://www.ti.com/general/docs/lit/getliterature.tsp?genericPartNumber=BQ2970&amp;&amp;fileType=pdf&src-supplier=Avnet+Asia, ComponentLink2Description=http://www.ti.com/general/docs/lit/getliterature.tsp?genericPartNumber=BQ2970&&fileType=pdf&src-supplier=Avnet, ComponentLink2URL=http://www.ti.com/general/docs/lit/getliterature.tsp?genericPartNumber=BQ2970&&fileType=pdf&src-supplier=Avnet, ComponentLink3Description=http://www.ti.com/lit/gpn/bq2970?src-supplier=Mouser, ComponentLink3URL=http://www.ti.com/lit/gpn/bq2970?src-supplier=Mouser, ComponentLink4Description=http://www.ti.com/lit/ds/symlink/bq2971.pdf?src-supplier=Digi-Key, ComponentLink4URL=http://www.ti.com/lit/ds/symlink/bq2971.pdf?src-supplier=Digi-Key, Contact Plating=Gold, Fault Protection="Over Current", Lead Free="Lead Free", Manufacturer Part Number 1=BQ29700DSER, Mount="Surface Mount", Number of Cells=1, Number of Pins=6, Packaging="Tape and Reel", Pricing 1="1=0.69000, 10=0.60800, 100=0.46650, 500=0.36874, 1000=0.29499 (USD)", RoHS=Yes, Stock 1=54841, Supplier 1=Digi-Key, Weight=0.000342oz
Y1: library part 9HT11-32.768KDZB-T, "32.768kHz ±20ppm Crystal 6pF 90 kOhms 2-SMD, No Lead", Parameter 1=9HT11, Parameter 2=-32.76, Parameter 3=8KDZ, Parameter 4=B-T
Y2: library part 7M-16.000MEEQ-T, "16MHz ±10ppm Crystal 10pF 80 Ohms 4-SMD, No Lead", Parameter 1=7M-16, Parameter 2=.000M, Parameter 3=EEQ-T

## Free pads (board coordinates)
  round 2.4 hole 2.4 unplated: 0(83.109,101.861) 0(90.235,76.23)

## Via types
v1: diameter 0.508, hole 0.203, Top Layer to Bottom Layer, tented both sides, 106 vias

## Nets (pads, with @x,y where several pads share a name; then routed paths per layer and width w, separated by ;. In a path a pad name is that pad's centre, name@x,y a point inside that pad or via, vN(x,y) a via of type N, cw(c..) or ccw(c..) an arc to the next point about the centre after c; other vN are vias at no path point)
1V2: C10.1 U3.B3 | length 2.4
  Top Layer w0.102: C10.1 91.443,93.061 91.742,93.36 92.515,93.36 92.61,93.455 93.335,93.455 93.395,93.515 93.395,93.694 U3.B3
1V4: C8.1 C9.1 U3.A6 U3.B18 | length 15.6
  Top Layer w0.102: C9.1 91.677,95.293 91.677,95.138 91.76,95.055 91.945,95.055 v1(92.375,94.625) 92.485,94.625 92.621,94.761 92.812,94.761 U3.A6 ; U3.B18 97.495,97.03 97.555,97.09 97.555,97.84 97.57,97.855 97.57,97.857 v1(98.253,98.54)
  Top Layer w0.203: v1(98.253,98.54) 98.253,100.127 99.084,100.959 99.824,100.959 100.073,101.207 C8.1
  Bottom Layer w0.102: v1(92.375,94.625) 94.77,97.02 96.733,97.02 v1(98.253,98.54)
1V8: C11.1 U3.A8 | length 1.9
  Top Layer w0.102: C11.1 91.44,94.195 92.015,93.62 92.375,93.62 92.485,93.73 U3.A8
1V8P: C12.1 U3.B4 | length 3.2
  Top Layer w0.102: C12.1 91.378,91.793 91.97,92.385 91.97,92.895 91.98,92.905 92.505,92.905 93.16,92.905 93.165,92.91 93.385,92.91 93.445,92.97 93.445,93.166 U3.B4
3V3: C1.1 C2.1 C5.1 C7.1 C13.1 M1.1 R1.2 R4.2 R5.2 U1.11 U1.12 U1.13 U1.14 U1.23 U1.24 U2.1 U2.8 U2.14 U3.A15 U3.B2 U4.8 | length 37.6
  Top Layer w0.102: U1.24 91.188,87.252 91.188,86.827 ; v1(91.315,86.59) 91.315,86.7 91.481,86.866 91.481,87.231 U1.23 ; C7.1 91.56,96.807 91.56,96.39 91.62,96.33 91.805,96.33 91.91,96.225 91.91,95.865 92.055,95.72 92.6,95.72 92.665,95.655 93.156,95.655 U3.B2 ; U1.11 95.209,84.581 95.209,84.191 v1@95.395,84.005 ; U1.14 95.209,87.231 95.209,86.846 v1@95.365,86.69 ; v1(95.365,86.58) v1@95.365,86.69 ; v1(95.395,83.895) v1@95.395,84.005 ; U1.12 95.545,84.155 v1@95.395,84.005 ; U1.13 95.502,87.252 95.502,86.827 v1@95.365,86.69
  Top Layer w0.203: U4.8 81.681,92.583 82.168,92.096 82.168,91.691 v1(82.227,91.633) 82.748,91.112 82.748,90.673 C5.1 ; v1(85.021,90.363) 85.791,90.363 R1.2 ; v1(90.083,99.783) 90.831,99.035 90.831,97.636 91.378,97.089 C7.1 ; U3.A15 96.15,91.561 v1(96.15,91.55) C13.1 ; R4.2 101.449,88.673 101.873,88.673 102.1,88.9 U2.8 ; U2.8@102.86,88.894 102.903,88.851 103.531,88.851 103.592,88.791 104.939,88.791 105.043,88.894 ; C2.1 103.505,94.827 R5.2 103.57,93.495 C1.1 104.748,93.495 105.225,93.018 U2.1 ; v1(104.606,89.781) 104.664,89.723 104.664,89.273 105.043,88.894 ; U2.1@105.231,90.765 105.231,90.509 105.274,90.466 106.076,90.466 106.346,90.197 ; 106.346,89.103 106.137,88.894 105.043,88.894 ; 106.371,89.138 106.371,90.232
  Layer 2 w0.203: v1(95.365,86.58) 96.245,86.58 96.835,87.17 96.835,90.865 v1(96.15,91.55)
16M_N: U3.A30 Y2.3 | length 3.6
  Top Layer w0.203: U3.A30 99.301,98.5 100.7,98.5 100.701,98.501 100.801,98.501 101.3,99 Y2.3
16M_P: U3.A29 Y2.1 | length 5.4
  Top Layer w0.203: U3.A29 99.255,97.03 100.055,97.83 102.17,97.83 103,97 Y2.1
32K_N: U3.B13 Y1.1 | length 3.3
  Top Layer w0.102: U3.B13 98.106,94.005 98.83,94.005 99.663,94.838 100.335,94.838 Y1.1
32K_P: U3.A23 Y1.2 | length 2.2
  Top Layer w0.102: U3.A23 100.541,93.73 Y1.2
ANT: ANT1.1 C17.2 L2.1 | length 3.4
  Top Layer w0.102: L2.1 97.895,103.03 C17.2 98.05,103.135 98.42,103.505 ANT1.1
B_GND: BAT1.2 C14.2 Q1.3 R9.1 U5.4 | length 18.4
  Top Layer w0.203: R9.1 81.396,82.161 81.515,82.042 84.154,82.042 84.172,82.06 ; U5.4 84.336,84.582 84.297,84.543 84.297,84.173 83.992,83.867 Q1.3 83.992,82.24 84.172,82.06 ; v1(85.272,81.88) 84.352,81.88 84.172,82.06 ; C14.2 87.684,85.085 87.932,84.836 v1(88.508,84.836)
  Bottom Layer w0.508: v1(85.272,81.88) BAT1.2@87.305,79.847 ; BAT1.2 BAT1.2@87.305,79.847 ; v1(88.508,84.836) 87.305,83.633 BAT1.2@87.305,79.847
BAT: C14.1 R6.2 U5.5 | length 3.2
  Top Layer w0.203: U5.5 86.276,85.082 C14.1 R6.2
COUT: Q1.2 R8.1 U5.2 | length 14.8
  Top Layer w0.203: U5.2@83.417,85.086 U5.2 82.741,85.082 82.6,85.224 82.6,87.521 82.719,87.64 85.35,87.64 85.525,87.465 ; Q1.2 84.642,83.867 84.865,84.09 86.856,84.09 86.975,84.209 86.975,87.346 86.856,87.465 85.525,87.465 ; R8.1 85.052,86.992 85.525,87.465
DISPLAY_BCKL: R13.1 U3.A19 | length 12.7
  Top Layer w0.102: U3.A19 97.887,92.024 97.887,91.788 v1(98.175,91.5)
  Top Layer w0.203: R13.1 94.588,81.753 v1(95.57,81.753)
  Layer 2 w0.203: v1(95.57,81.753) 98.35,84.533 98.35,86.235 98.195,86.39 98.195,91.185 98.175,91.205 v1(98.175,91.5)
DISPLAY_CLK: U1.8 U3.A7 | length 16.2
  Top Layer w0.102: v1(92.2,94.04) 92.278,94.118 92.719,94.118 U3.A7 ; U1.8 93.998,84.593 93.998,83.822 v1(94.05,83.77)
  Layer 2 w0.102: v1(92.2,94.04) 92.43,94.04 93.55,92.92 93.55,92.41 90.335,89.195 90.335,86.31 92.2,84.445 93.375,84.445 v1(94.05,83.77)
DISPLAY_CS: U1.9 U3.A33 | length 18.1
  Top Layer w0.102: U1.9 94.345,85.275 94.405,85.335 v1(94.745,85.335) ; v1(94.8,99.325) 95.631,98.494 U3.A33
  Layer 2 w0.102: v1(94.745,85.335) 94.66,85.42 94.66,91.74 95.835,92.915 95.835,98.26 94.8,99.295 v1(94.8,99.325)
DISPLAY_MOSI: U1.6 U3.B22 | length 20.1
  Top Layer w0.102: U1.6 93.16,84.66 93.16,85.325 v1(93.175,85.34) ; v1(93.875,99.775) 93.875,99.065 94.805,98.135 94.805,97.306 U3.B22
  Layer 2 w0.102: v1(93.175,85.34) 94.445,86.61 94.445,89.46 94.44,89.465 94.44,91.84 95.62,93.02 95.62,97.865 93.875,99.61 v1(93.875,99.775)
DISPLAY_RST: U1.10 U3.A36 | length 21.8
  Top Layer w0.102: v1(93.525,98.115) 93.71,98.115 93.972,97.853 93.972,97.589 U3.A36 ; U1.10 94.748,84.643 94.748,83.862 v1(94.75,83.86)
  Layer 2 w0.102: v1(93.525,98.115) 95.395,96.245 95.395,93.89 90.54,89.035 90.54,86.41 92.3,84.65 94.65,84.65 94.71,84.59 94.71,83.9 v1(94.75,83.86)
DOUT: Q1.4 R9.2 U5.3 | length 3.4
  Top Layer w0.203: R9.2 U5.3@83.381,84.582 ; Q1.4 83.342,84.543 U5.3@83.381,84.582 ; U5.3 U5.3@83.381,84.582
GND: C1.2 C2.2 C3.2 C4.2 C5.2 C6.2 C7.2 C8.2 C9.2 C10.2 C11.2 C12.2 C13.2 C15.2 C16.1 C17.1 D1.1 GND1.1 GND2.1 P1.2 Q2.1 Q2.3 R2.1 R3.1 R11.1 R14.2 U1.3 U1.4 U1.15 U1.16 U2.5 U2.7 U2.10 U2.12 U3.B9 U3.B19 U3.B21 U3.GND U4.4 Y2.2 Y2.4 | length 34.9
  Top Layer w0.102: C4.2 93.95,89.375 ; U3.GND@93.431,94.28 U3.GND@95.081,94.28 ; U3.GND@93.431,94.83 U3.GND@95.631,94.83 ; U3.GND@93.431,95.93 U3.GND@94.531,95.93 ; U3.GND@93.706,97.03 93.981,97.03 94.05,96.961 94.05,96.411 U3.GND@94.531,95.93 ; v1(93.975,89.95) 93.95,89.925 93.95,89.375 ; U1.16 94.345,89.17 C6.2 ; U3.GND@94.531,92.63 94.531,93.73 U3.GND@95.081,94.28 ; U1.15 94.745,89.18 C6.2 ; U3.B21 U3.GND@95.631,94.83 ; U3.GND@96.181,92.63 96.181,94.28 U3.GND@95.631,94.83 ; v1(96.375,90.05) 96.35,90.025 96.35,89.35 ; U3.B9 U3.GND@96.731,93.73 ; U3.B19 96.731,95.93 U3.GND@96.181,95.38 ; C13.2 96.95,89.35 96.35,89.35 ; U3.GND@97.831,94.83 U3.GND@95.631,94.83 ; U3.GND@97.831,95.38 U3.GND@96.181,95.38 ; U2.5 103.323,90.667 103.323,90.212 103.42,90.115 103.42,89.824 v1(103.844,89.4) ; 93.95,89.375 C6.2 ; U3.GND@94.531,95.93 U3.GND@95.631,94.83 ; C6.2 95.725,89.375 C3.2 96.35,89.35 ; U3.GND@95.081,94.28 U3.GND@95.631,94.83 ; U3.GND@95.631,94.83 U3.GND@96.181,95.38
  Top Layer w0.203: U2.7 v1(103.844,89.4)
  other v1: 85.725,76.2 99.06,76.2 82.867,78.105 92.392,78.105 80.01,80.01 81.915,80.01 89.535,80.01 91.44,80.01 79.057,81.915 90.487,81.915 78.105,83.82 80.01,83.82 104.775,83.82 80.962,85.725 92.392,85.725 103.822,85.725 105.727,85.725 78.105,87.63 106.68,87.63 79.057,89.535 84.772,89.535 86.677,89.535 107.632,89.535 76.2,91.44 80.01,91.44 83.82,91.44 77.153,93.345 79.057,93.345 105.727,93.345 106.68,95.25 88.582,97.155 105.727,97.155 80.01,99.06 89.535,99.06 97.155,99.06 99.06,99.06 104.775,99.06 97.155,100.76 80.962,100.965 94.297,100.965 98.108,100.965 98.73,101.535 95.965,101.575 98.74,102.195 95.69,102.26 91.44,102.87 93.345,102.87 95.25,102.87 95.595,103.71 95.81,104.505
I2C_SCL: R5.1 U2.4 U3.B14 | length 10.8
  Top Layer w0.102: U3.B14 97.831,94.495 97.891,94.555 98.98,94.555 100.02,95.595 101.475,95.595 101.535,95.535 101.535,93.795 101.595,93.735 101.93,93.735 R5.1
  Top Layer w0.203: R5.1 102.121,93.544 102.581,93.544 102.7,93.425 102.7,92.744 102.819,92.625 103.325,92.625 103.725,92.225 U2.4
I2C_SDA: R4.1 U2.6 U3.A20 | length 7.2
  Top Layer w0.203: U3.A20 98.975,91.486 98.975,89.45 99.325,89.1 100.375,89.1 101.1,89.825 R4.1 101.275,89.9 U2.6
LED_K: R13.2 R14.1 U1.1 U1.2 | length 7
  Top Layer w0.102: U1.1 91.145,83.335 91.393,83.087 ; U1.2 91.545,83.24 91.393,83.087 ; R13.2 93.153,81.888 92.854,82.187 92.293,82.187 91.393,83.087
  Top Layer w0.203: R14.1 R13.2
LX: L1.2 U3.A11 | length 5.8
  Top Layer w0.203: L1.2 90.236,88.876 90.876,88.876 90.995,88.995 90.995,90.385 92,90.385 92.415,90.8 92.415,91.064 U3.A11
LY: L1.1 U3.B5 | length 4.5
  Top Layer w0.203: L1.1 90.353,90.693 91.793,90.693 92.1,91 92.1,91.299 U3.B5
M_D: Q2.5 Q2.6 Q2.7 Q2.8 R10.2 | length 4.2
  Top Layer w0.102: Q2.8 Q2.7 Q2.6 Q2.5
  Top Layer w0.203: Q2.5@76.759,88.032 R10.2
M_OUT: M1.2 R10.1 | length 10.2
  Top Layer w0.203: R10.1@78.307,90.445 v1(78.307,91.347)
  Bottom Layer w0.203: v1(78.307,91.347) 78.307,94.672 81.467,97.832 82.106,97.832 82.49,98.217 M1.2
MOTOR_PWM: Q2.2 Q2.4 R11.2 U3.B15 | length 26.3
  Top Layer w0.102: U3.B15 98.107,95.654 98.813,95.654 v1@99.034,95.875 ; v1@98.897,95.78 98.992,95.875 v1@99.034,95.875 ; v1(99.075,95.875) v1@99.034,95.875
  Top Layer w0.203: Q2.2 79.677,86.614 79.999,86.614 80.352,86.967 80.352,87.912 80.253,88.011 ; Q2.4 79.662,88.011 80.253,88.011 ; v1(82.539,88.646) 82.456,88.646 82.327,88.517 81.645,88.517 R11.2 80.51,88.268 80.253,88.011
  Bottom Layer w0.102: v1(82.539,88.646) 86.723,92.83 94.77,92.83 97.815,95.875 v1(99.075,95.875)
NetQ1_5: Q1.5 Q1.6 Q1.7 Q1.8 | length 2
  Top Layer w0.203: Q1.5 Q1.6 Q1.7 Q1.8
PI_NETWORK: C16.2 L2.2 U3.B20 | length 6.4
  Top Layer w0.102: U3.B20 96.135,97.076 96.135,100.785 96.671,101.321 96.671,101.651 L2.2 96.895,102.98 C16.2
PROT_V-: R7.1 U5.6 | length 2
  Top Layer w0.203: R7.1 83.655,86.93 84.297,86.288 84.297,85.621 84.336,85.582 U5.6
QSPI_CLK: U3.B1 U4.6 | length 15.8
  Top Layer w0.102: v1(92.19,97.425) 92.19,97.405 92.58,97.015 92.58,96.815 92.64,96.755 93.33,96.755 93.39,96.695 93.39,96.521 U3.B1
  Top Layer w0.203: v1(80.33,95.088) 80.348,95.106 81.364,95.106 U4.6
  Layer 2 w0.102: v1(80.33,95.088) 80.597,95.355 89.095,95.355 91.165,97.425 v1(92.19,97.425)
QSPI_CS: R1.1 U3.A5 U4.1 | length 10.7
  Top Layer w0.102: v1(92.38,95.235) 92.456,95.311 92.812,95.311 U3.A5
  Top Layer w0.203: R1.1 87.145,90.531 87.145,92.46 U4.1 87.321,92.583 87.555,92.859 ; 87.555,92.859 87.555,92.915 v1(87.95,93.31) ; 87.555,92.859 87.555,92.817 87.954,93.307 87.987,93.347 v1(87.95,93.31) ; 87.555,92.859 87.87,93.23 v1(87.95,93.31)
  Layer 2 w0.102: v1(87.95,93.31) 88.075,93.31 90,95.235 v1(92.38,95.235)
QSPI_IO0: U3.A2 U4.5 | length 16.4
  Top Layer w0.102: v1(92.175,99.075) 92.175,98.185 92.605,97.755 92.605,97.295 92.82,97.295 92.88,97.235 U3.A2 U3.A2
  Top Layer w0.203: v1(80.555,96.015) 80.613,96.073 80.761,96.073 81.081,96.393 U4.5
  Layer 2 w0.102: v1(80.555,96.015) 80.555,96.145 80.71,96.3 89.4,96.3 v1(92.175,99.075)
QSPI_IO1: U3.A3 U4.2 | length 7.2
  Top Layer w0.102: v1(92.135,96.72) 92.245,96.72 92.42,96.545 92.816,96.545 U3.A3
  Top Layer w0.203: U4.2 87.35,93.853 v1(88.077,94.58)
  Layer 2 w0.102: v1(88.077,94.58) 88.137,94.52 88.62,94.52 90.82,96.72 v1(92.135,96.72)
QSPI_IO2: U3.A1 U4.3 | length 8.1
  Top Layer w0.102: v1(92.875,98.375) 92.878,98.372 92.878,97.583 U3.A1
  Top Layer w0.203: U4.3 87.223,95.123 87.555,95.455 v1(87.95,95.85)
  Layer 2 w0.102: v1(87.95,95.85) 89.27,95.85 91.945,98.525 92.699,98.525 92.849,98.375 v1(92.875,98.375)
QSPI_IO3: U3.A4 U4.7 | length 14.7
  Top Layer w0.102: v1(92.355,96.135) 92.465,96.135 92.608,95.992 92.819,95.992 U3.A4
  Top Layer w0.203: v1(80.33,93.818) 80.348,93.836 81.364,93.836 U4.7
  Layer 2 w0.102: v1(80.33,93.818) 80.428,93.72 88.14,93.72 90.555,96.135 v1(92.355,96.135)
RST: R3.2 RST.1 U3.A21 | length 15.6
  Top Layer w0.203: v1(98.11,83.023) 98.193,83.023 98.723,82.493 98.736,82.493 RST.1 ; U3.A21 98.93,92.63 v1(99.17,92.39) 99.9,91.66 R3.2
  Layer 2 w0.203: v1(98.11,83.023) 99.17,84.083 v1(99.17,92.39)
SOCP: Q1.1 R2.2 R7.2 R8.2 U3.A18 | length 36.4
  Top Layer w0.102: U3.A18 97.328,92.033 97.328,91.807 97.55,91.585 v1(97.55,91.475)
  Top Layer w0.303: R7.2 83.804,88.578 87.399,88.578 v1(87.431,88.611) 88.543,88.611 89.105,88.049 89.105,84.028 88.449,83.371 87.868,83.371 R2.2 85.357,83.123 Q1.1
  Layer 2 w0.303: v1(87.431,88.611) 89.69,86.352 89.69,83.735 90.615,82.81 95.59,82.81 97.235,84.455 97.235,91.105 97.55,91.42 v1(97.55,91.475)
SWDCLK: CLK.1 U3.A14 | length 31.3
  Top Layer w0.102: v1(95.075,91.55) 95.078,91.553 95.078,92.077 U3.A14
  Top Layer w0.203: v1(98.677,86.609) 98.855,86.43 98.855,85.404 99.695,84.564 CLK.1
  Layer 2 w0.203: v1(95.075,91.55) 95.116,91.55 96.095,92.529 96.095,93.835 96.861,94.601 99.229,94.601 101.315,92.515 101.315,85.865 100.83,85.865 99.87,86.825 99.701,86.825 99.582,86.707 99.582,83.782 98.135,82.335 97.413,83.058 98.62,84.265 98.62,84.275 98.677,84.332 v1(98.677,86.609)
SWDIO: IO.1 U3.B8 | length 16
  Top Layer w0.102: U3.B8 95.7,92.561 95.7,92.43 95.765,92.365 95.885,92.365 95.895,92.355 96.395,92.355 96.455,92.295 96.455,91.845 96.515,91.785 96.69,91.785 96.925,91.55 v1(96.925,91.525)
  Top Layer w0.203: v1(100.855,86.515) 102.362,85.008 IO.1
  Layer 2 w0.203: v1(96.925,91.525) 96.925,92.16 98.549,92.16 98.549,93.02 99.395,93.02 99.67,92.745 99.67,87.7 v1(100.855,86.515)
UART_RX: RX.1 U3.A35 | length 7.7
  Top Layer w0.102: RX.1 89.869,102.155 90.48,102.155 94.531,98.104 U3.A35
UART_TX: TX.1 U3.B23 | length 10.7
  Top Layer w0.102: TX.1 88.182,101.175 91.13,101.175 94.255,98.05 94.255,97.306 U3.B23
VBAT: BAT1.1 C4.1 C6.1 R6.1 U3.A13 U3.B6 | length 19.6
  Top Layer w0.102: v1(93.3,90.125) 93.3,90.725 C4.1
  Top Layer w0.203: R6.1 87.684,86.514 87.932,86.266 88.475,86.266 v1(88.508,86.233) ; C4.1 C6.1 94.531,90.794 U3.A13 94,92.611 U3.B6
  Bottom Layer w0.502: 88.368,87.608 88.508,87.467 v1(88.508,86.233)
  Bottom Layer w0.635: BAT1.1 83.788,83.028 88.368,87.608 90.885,90.125 v1(93.3,90.125)
VBUS: C3.1 C15.1 R12.2 U3.B7 | length 17.6
  Top Layer w0.102: U3.B7 95.35,92.361 95.35,92.245 95.355,92.24 95.355,91.865 95.45,91.77 95.465,91.77 95.59,91.645 95.59,90.91 C3.1
  Top Layer w0.203: v1(95.6,90.075) 95.6,90.6 C3.1 ; v1(98.364,79.975) 98.759,79.58 99.257,79.082 R12.2 99.764,79.405 100.992,79.405 C15.1
  Bottom Layer w0.203: v1(95.6,90.075) 96.04,89.635 96.04,83.645 98.364,81.321 v1(98.364,79.975)
VBUS_IN: D1.2 P1.1 R12.1 | length 4.9
  Top Layer w0.203: P1.1 P1.1@97.321,77.382 ; D1.2 97.5,79.502 97.451,79.453 97.451,77.512 P1.1@97.321,77.382 ; R12.1 P1.1@97.321,77.382
XL_INT_1: U2.11 U3.A12 | length 14.6
  Top Layer w0.102: v1(93.65,91.55) 93.938,91.838 93.938,92.037 U3.A12
  Top Layer w0.203: v1(104.164,86.952) 104.225,87.013 U2.11
  Bottom Layer w0.203: v1(93.65,91.55) 94.19,91.01 97.92,91.01 98.48,90.45 100.45,88.48 103.33,88.48 104.164,87.646 v1(104.164,86.952)
XL_INT_2: U2.9 U3.A10 | length 13.5
  Top Layer w0.102: v1(92.34,92.195) 92.446,92.195 U3.A10
  Top Layer w0.203: v1(102.64,87.968) 103.177,87.968 103.22,88.011 103.22,88.035 U2.9
  Bottom Layer w0.203: v1(92.34,92.195) 92.515,92.02 92.515,91.795 93.605,90.705 97.76,90.705 100.497,87.968 v1(102.64,87.968)
pads on no net: U1.0 U1.5 U1.7 U1.17 U1.18 U1.19 U1.20 U1.21 U1.22 U2.2 U2.3 U2.13 U2.15 U2.16 U3.A9 U3.A16 U3.A17 U3.A22 U3.A24 U3.A25 U3.A26 U3.A27 U3.A28 U3.A31 U3.A32 U3.A34 U3.A37 U3.B10 U3.B11 U3.B12 U3.B16 U3.B17 U5.1

## Polygon pours and split planes (outlines as drawn)
GND on Top Layer "GND_L01_P046" (solid, remove dead copper, pour order 46): 86.334,74.641 86.369,74.676 97.21,74.516 ccw(c91.948,89.916) 108.222,89.916 ccw(c91.948,89.916) 99.023,104.572 98.323,104.89 85.602,104.902 ccw(c91.948,89.916) 75.674,89.916 ccw(c91.948,89.916)
3V3 on Bottom Layer "3V3_L04_P047" (solid, remove dead copper, pour order 47): 86.334,74.641 86.369,74.676 97.21,74.516 ccw(c91.948,89.916) 108.222,89.916 ccw(c91.948,89.916) 99.023,104.572 98.323,104.89 85.602,104.902 ccw(c91.948,89.916) 75.674,89.916 ccw(c91.948,89.916)
GND on Layer 1 "GND_L02_P048" (solid, remove dead copper, pour order 48): 86.334,74.641 86.369,74.676 97.21,74.516 ccw(c91.948,89.916) 108.222,89.916 ccw(c91.948,89.916) 99.023,104.572 98.323,104.89 85.602,104.902 ccw(c91.948,89.916) 75.674,89.916 ccw(c91.948,89.916)
GND on Layer 2 "GND_L03_P049" (solid, remove dead copper, pour order 49): 86.334,74.641 86.369,74.676 97.21,74.516 ccw(c91.948,89.916) 108.222,89.916 ccw(c91.948,89.916) 99.023,104.572 98.323,104.89 85.602,104.902 ccw(c91.948,89.916) 75.674,89.916 ccw(c91.948,89.916)

## Other copper
Multi-Layer:
  pour cut-out: 90.144,76.281 90.144,75.291 90.945,74.49 91.72,75.265 91.72,76.89 90.895,77.715 89.685,77.715 88.75,76.78 88.75,75.44 89.72,74.47 90.895,74.47
  pour cut-out: 82.996,102.013 82.996,101.024 83.798,100.222 84.573,100.997 84.573,102.622 83.748,103.447 82.538,103.447 81.603,102.512 81.603,101.173 82.573,100.202 83.748,100.202
  pour cut-out: 96.26,103.56 98.41,103.56 98.41,101.49 98.26,101.34 98.25,101.35 96.26,101.35
  pour cut-out: 98.67,104.732 98.445,103.87 98.325,103.2 99.281,101.94 101.879,102.15 102.467,102.355 101.425,103.146 101.231,103.34 99.54,104.337

## Silkscreen, mask and mechanical layers (free items; w line width, h text height)
Drill Guide:
  circle w0.127: c81.455,105.235 r8.919
  lines w0.127: 93.473,75.27 cw(c93.13,90.235) 94.253,75.308

## Text inside footprints (layer, text, board x,y; h text height)
U1: Mechanical 1 "ACTIVE AREA" at 88.97,101.295 h0.75